# Allegro board B07_1201.brd
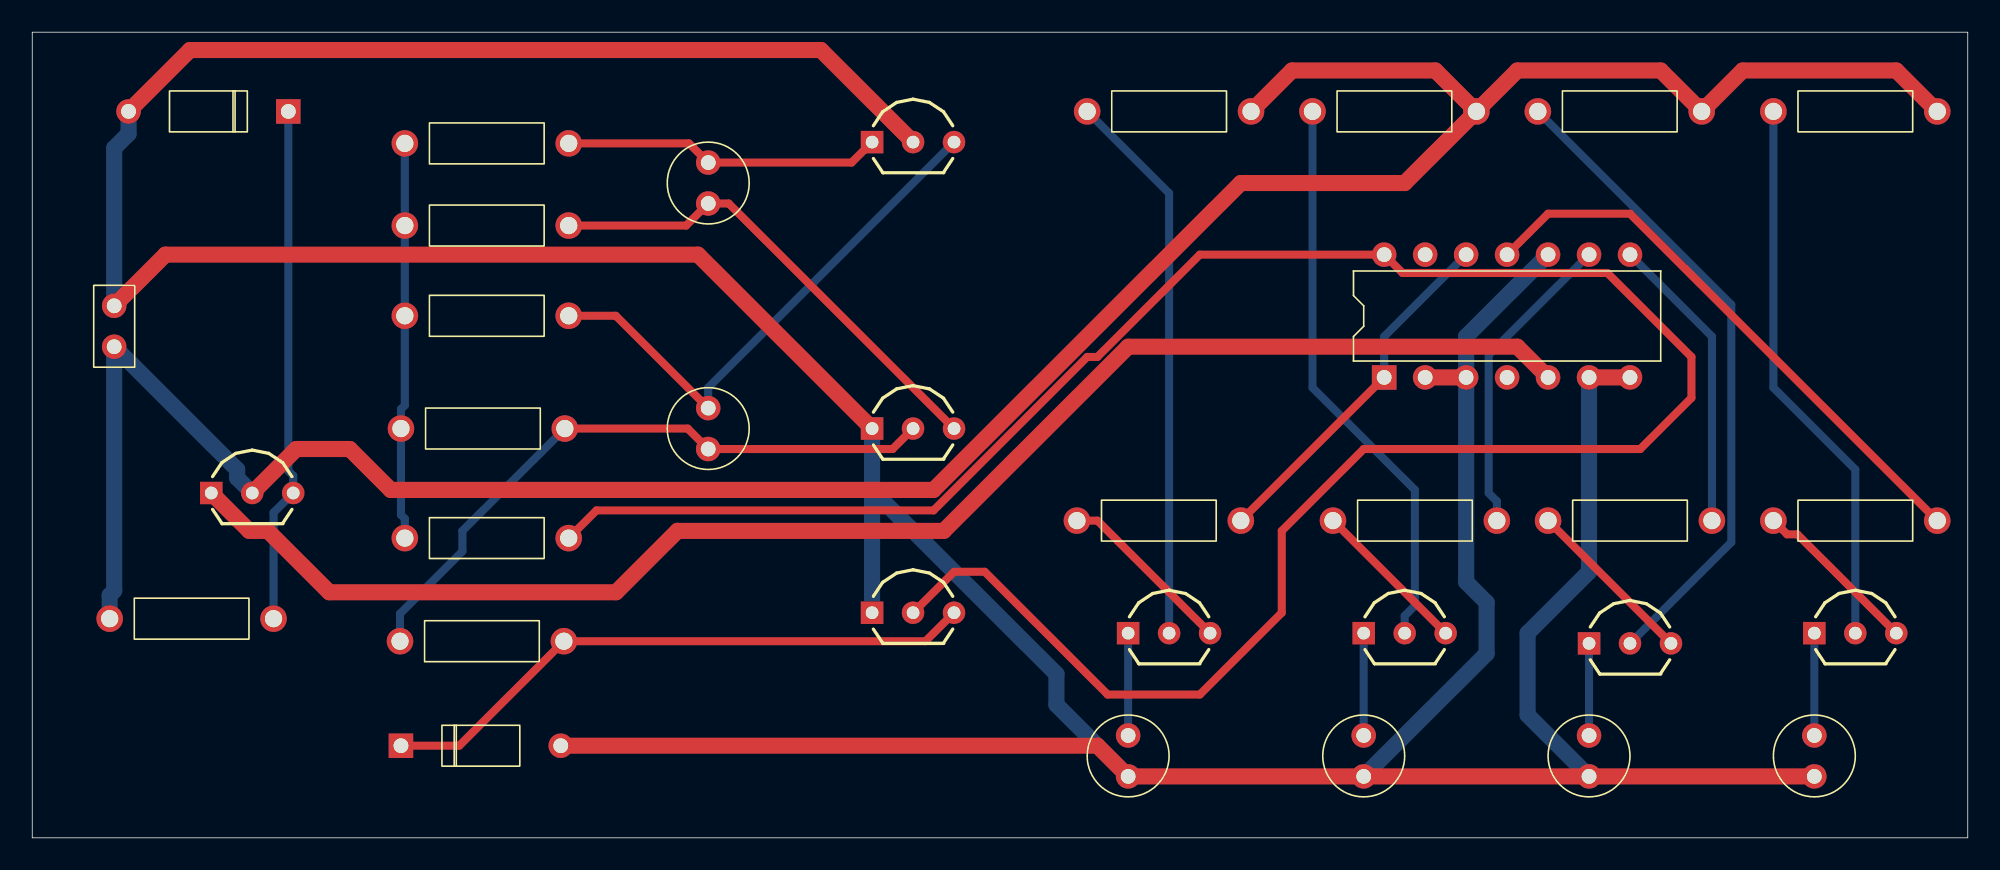
[diagram p0: board, top side]
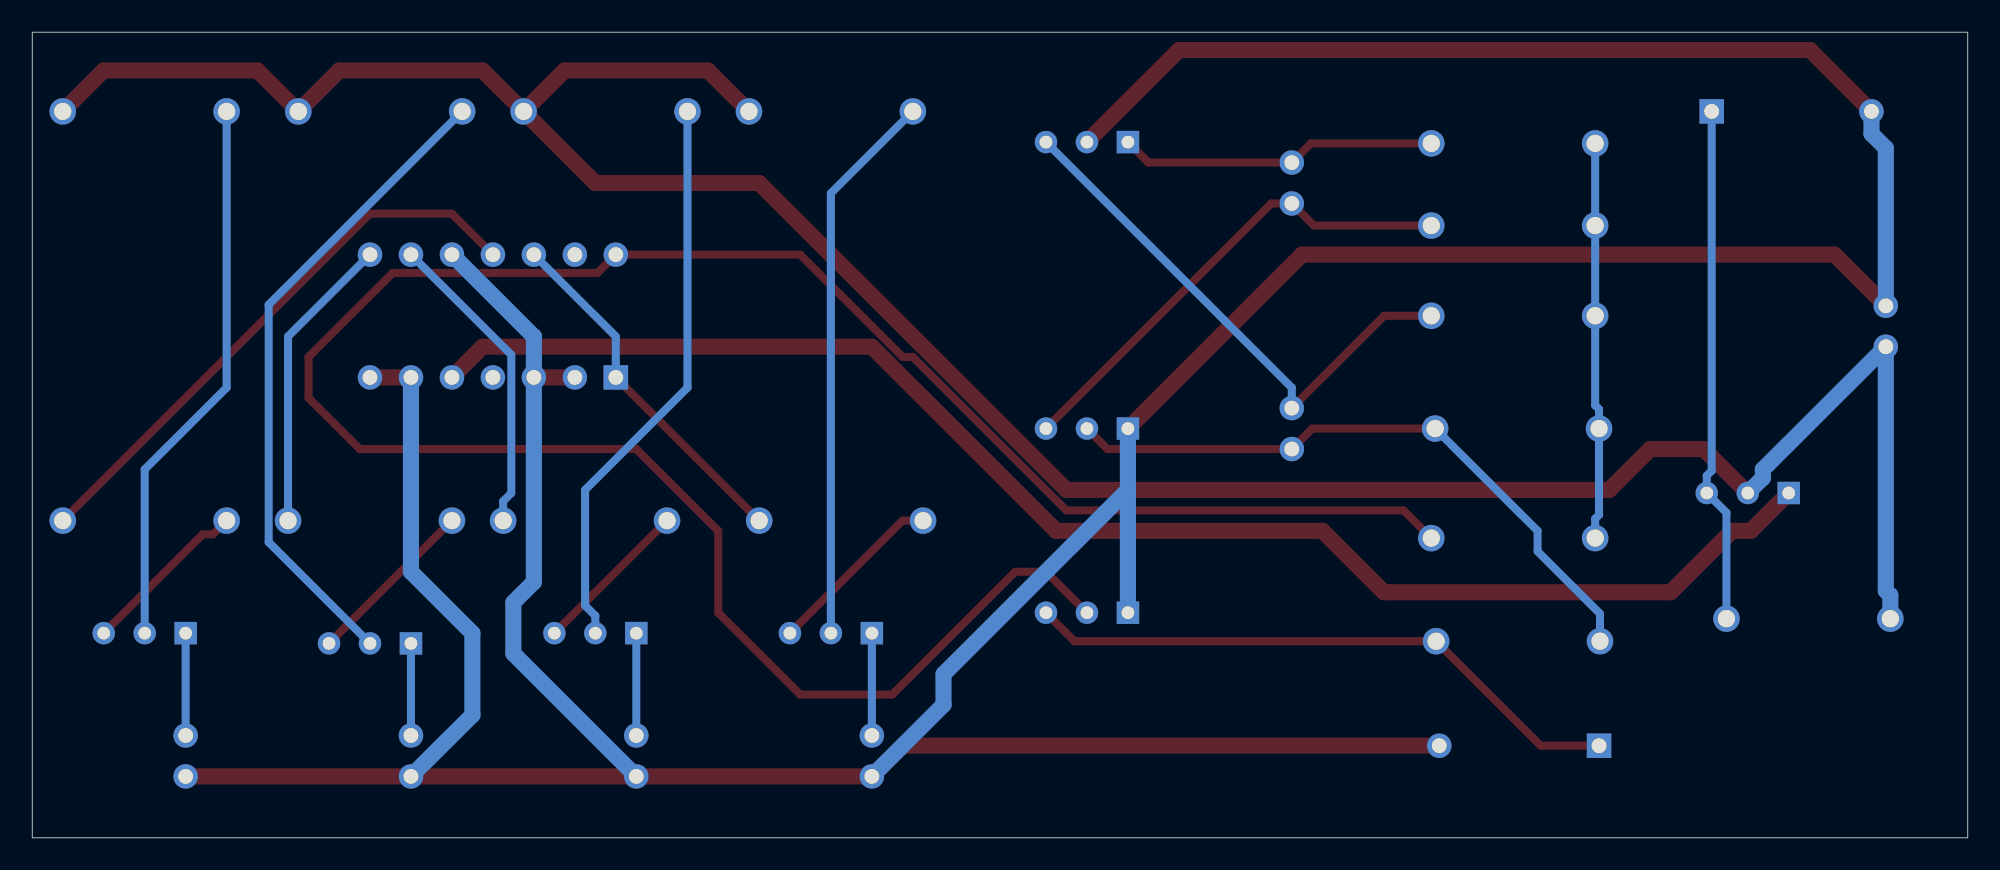
[diagram p1: board, bottom side, seen from below]

Outline 120 x 50 mm; copper layers: TOP, BOTTOM. Coordinates in mm from the lower left corner of the outline.
Outline path: 0,50 0,0 120,0 120,50 0,50

## Design rules (mm)
constraint set DEFAULT: min track width 0.5
nets with their own width: min track width 1; nets +9V GND VCC

## Placement (name value [footprint] x y rotation side)
C1  CAP POL  [CAP196]  41.91 41.91 180 top
C2  CAP POL  [CAP196]  41.91 24.13 0 top
D1  DIODE  [DO41]  22.86 5.71 270 top
D2  DIODE ZENER  [DO41]  15.88 45.09 90 top
D3  LED  [CAP196]  67.94 3.81 0 top
D4  LED  [CAP196]  82.55 3.81 0 top
D5  LED  [CAP196]  96.52 3.81 0 top
D6  LED  [CAP196]  110.49 3.81 0 top
J1  CON2  [JUMPER2]  5.08 30.48 90 top
NOREF  -  []  34.72 0 90 top
NOREF#2  -  []  0 25.76 0 top
Q1  NPN ECB  [TO92100]  52.07 13.97 0 top
Q2  NPN ECB  [TO92100]  52.07 43.18 0 top
Q3  NPN ECB  [TO92100]  52.07 25.4 0 top
Q4  NPN ECB  [TO92100]  11.1 21.4 0 top
Q5  NPN ECB  [TO92100]  67.94 12.7 0 top
Q6  NPN ECB  [TO92100]  82.55 12.7 0 top
Q7  NPN ECB  [TO92100]  96.52 12.06 0 top
Q8  NPN ECB  [TO92100]  110.49 12.7 0 top
R1  R  [RES400]  23.1 43.1 270 top
R2  R  [RES400]  23.1 38 270 top
R3  R  [RES400]  23.1 32.4 270 top
R4  R  [RES400]  22.86 25.4 270 top
R5  R  [RES400]  23.1 18.6 270 top
R6  R  [RES400]  22.8 12.2 270 top
R7  R  [RES400]  75.56 45.09 90 top
R8  R  [RES400]  89.53 45.09 90 top
R9  R  [RES400]  103.5 45.09 90 top
R10  R  [RES400]  118.11 45.09 90 top
R11  R  [RES400]  4.8 13.6 270 top
R12  R  [RES400]  74.93 19.68 90 top
R13  R  [RES400]  90.81 19.68 90 top
R14  R  [RES400]  104.14 19.68 90 top
R15  R  [RES400]  118.11 19.68 90 top
U1  7490  [DIP14_3]  83.82 28.57 90 top

## Library data of the parts
C1 C2 = CAP POL: Tolerance: ***; User Part Number: ***
D1 = DIODE
D2 = DIODE ZENER
D3-D6 = LED: Tolerance: ***; User Part Number: ***
J1 = CON2: User Part Number: ***
Q1-Q3 Q5-Q8 = NPN ECB
Q4 = NPN ECB_2
R1-R15 = R: Tolerance: ***; User Part Number: ***
U1 = 7490: Tolerance: ***; User Part Number: ***

## Footprints (pads in the part's own frame, mm; a bottom-side part is the same pattern mirrored in y, then rotated)
CAP196
  round 1.524 hole 0.914: 1(0,0) 2(0,2.54)
DIP14_3
  rect 1.524x1.524 hole 0.914: 1(0,0)
  round 1.524 hole 0.914: 2(0,-2.54) 3(0,-5.08) 4(0,-7.62) 5(0,-10.16) 6(0,-12.7) 7(0,-15.24) 8(7.62,-15.24) 9(7.62,-12.7) 10(7.62,-10.16) 11(7.62,-7.62) 12(7.62,-5.08) 13(7.62,-2.54) 14(7.62,0)
DO41
  rect 1.524x1.524 hole 0.914: 1(0,0)
  round 1.524 hole 0.914: 2(0,9.906)
JUMPER2
  round 1.524 hole 0.914: 1(0,0) 2(2.54,0)
RES400
  round 1.651 hole 1.067: 1(0,0) 2(0,10.16)
TO92100
  rect 1.397x1.397 hole 0.787: 1(0,0)
  round 1.397 hole 0.787: 2(2.54,0) 3(5.08,0)

## Nets
+9V: J1.1 Q4.2 R7.1 R8.1 R9.1 R10.1 R11.1
GND: D1.2 D2.2 D3.1(CATHODE) D4.1(CATHODE) D5.1(CATHODE) D6.1(CATHODE) J1.2 Q1.1(E) Q2.2 Q3.1(E) U1.2 U1.3 U1.6 U1.7(R92) U1.10
VCC: Q4.1(E) U1.5
NET1: R12.1 U1.1 U1.12
NET2: R13.1 U1.9
NET3: R14.1 U1.8
NET4: R15.1 U1.11
N00824: R1.1 R2.1 R3.1 R4.1 R5.1
N00860: C2.1 Q3.2 R4.2 R6.1
N00871: C1.1 Q2.1(E) R1.2
N00878: C1.2 Q3.3 R2.2
N00885: C2.2 Q2.3 R3.2
N01044: D1.1(K) Q1.3 R6.2
N01109: Q1.2 R5.2 U1.14
N01343: D2.1(CATHODE) Q4.3 R11.2
N01467: Q5.2 R7.2
N01471: Q5.3 R12.2
N01475: D3.2 Q5.1(E)
N01540: D4.2 Q6.1(E)
N01544: Q6.3 R13.2
N01548: Q6.2 R8.2
N01571: D5.2 Q7.1(E)
N01579: Q7.2 R9.2
N01640: Q7.3 R14.2
N01748: D6.2 Q8.1(E)
N01760: Q8.2 R10.2
N01768: Q8.3 R15.2

Pads without a net: U1 4 13

## Routing (per net, layer and track width the routed paths; a pad name or vN(x,y) marks a point on that pad's centre or on a via; arc(x,y) is an arc through that point)
+9V: length 166.3
  TOP w1: R8.1 92.08,47.62 100.97,47.62 R9.1 106.05,47.62 115.57,47.62 R10.1 ; R8.1 85.09,40.64 74.93,40.64 55.88,21.59 22.23,21.59 19.68,24.13 16.37,24.13 Q4.2 ; R8.1 87,47.62 78.11,47.62 R7.1
  BOTTOM w1: R11.1 4.8,15.05 5.08,15.33 J1.1 12.7,22.86 12.7,22.34 Q4.2
GND: length 303.3
  TOP w1: U1.6 U1.7 ; U1.2 U1.3 ; D2.2 9.78,48.9 48.9,48.9 Q2.2 ; J1.2 8.26,36.2 41.27,36.2 Q3.1 ; D6.1 D5.1 D4.1 D3.1 66.04,5.71 D1.2
  BOTTOM w1: 52.07,21.59 Q1.1 ; 52.07,21.59 Q3.1 ; 52.07,21.59 63.5,10.16 63.5,8.26 D3.1 ; D5.1 92.71,7.62 92.71,12.7 96.52,16.51 U1.6 ; J1.2 5.08,42.81 5.97,43.7 D2.2 ; U1.10 88.9,31.11 U1.3 88.9,15.88 90.17,14.61 90.17,11.43 D4.1
VCC: length 92.5
  TOP w1: U1.5 92.08,30.48 67.94,30.48 56.52,19.05 40.01,19.05 36.2,15.24 18.41,15.24 14.61,19.05 13.45,19.05 Q4.1
NET1: length 22.3
  TOP w0.5: R12.1 U1.1
  BOTTOM w0.5: U1.1 83.82,31.11 U1.12
NET2: length 19.3
  BOTTOM w0.5: R13.1 90.81,20.89 90.3,21.39 90.3,29.98 U1.9
NET3: length 18.6
  BOTTOM w0.5: U1.8 104.14,31.11 R14.1
NET4: length 35.6
  TOP w0.5: U1.11 93.98,38.73 99.06,38.73 R15.1
N00824: length 24.7
  BOTTOM w0.5: R5.1 23.1,19.8 22.86,20.04 R4.1 22.86,26.6 23.1,26.84 R3.1 R2.1 R1.1
N00860: length 40.1
  TOP w0.5: R4.2 40.64,25.4 C2.1 53.34,24.13 Q3.2
  BOTTOM w0.5: R6.1 22.8,13.91 26.67,17.78 26.67,19.05 R4.2
N00871: length 19.8
  TOP w0.5: R1.2 40.72,43.1 C1.1 50.8,41.91 Q2.1
N00878: length 30.2
  TOP w0.5: Q3.3 43.18,39.37 C1.2 40.54,38 R2.2
N00885: length 33.8
  TOP w0.5: R3.2 36.18,32.4 C2.2
  BOTTOM w0.5: Q2.3 41.91,27.94 C2.2
N01044: length 37.7
  TOP w0.5: Q1.3 55.38,12.2 R6.2 26.48,5.71 D1.1
N01109: length 145.1
  TOP w0.5: R5.2 34.98,20.32 55.88,20.32 65.41,29.84 66.04,29.84 72.39,36.2 U1.14 84.96,35.06 97.66,35.06 102.87,29.84 102.87,27.3 99.69,24.13 82.55,24.13 77.47,19.05 77.47,13.97 72.39,8.89 66.67,8.89 59.05,16.51 57.15,16.51 Q1.2
N01343: length 32.1
  BOTTOM w0.5: D2.1 15.88,22.78 16.18,22.48 Q4.3 14.96,20.18 R11.2
N01467: length 34.5
  BOTTOM w0.5: R7.2 70.48,40.01 Q5.2
N01471: length 11.1
  TOP w0.5: R12.2 66.04,19.68 Q5.3
N01475: length 6.3
  BOTTOM w0.5: Q5.1 D3.2
N01540: length 6.3
  BOTTOM w0.5: Q6.1 D4.2
N01544: length 9.9
  TOP w0.5: 80.64,19.68 Q6.3
N01548: length 35.3
  BOTTOM w0.5: Q6.2 85.09,13.78 85.72,14.41 85.72,21.59 79.38,27.94 R8.2
N01571: length 5.7
  BOTTOM w0.5: Q7.1 D5.2
N01579: length 40.6
  BOTTOM w0.5: Q7.2 105.34,18.35 105.34,33.09 R9.2
N01640: length 10.8
  TOP w0.5: R14.2 Q7.3
N01748: length 6.3
  BOTTOM w0.5: Q8.1 D6.2
N01760: length 34.5
  BOTTOM w0.5: R10.2 107.95,27.94 113.03,22.86 Q8.2
N01768: length 10.5
  TOP w0.5: Q8.3 109.44,18.83 108.8,18.83 R15.2

## Text on the board
COMPVAL_TYPE_TOP: FIGURE | FINISHED_SIZE | 0.7874 | 0.9144 | 1.0668 | DRILL CHART: TOP to BOTTOM | ALL UNITS ARE IN MILLIMETERS | PLATED | QTY | 24 | 32 | 30
